# EAGLE board movimiento (EAGLE 8.7.1)
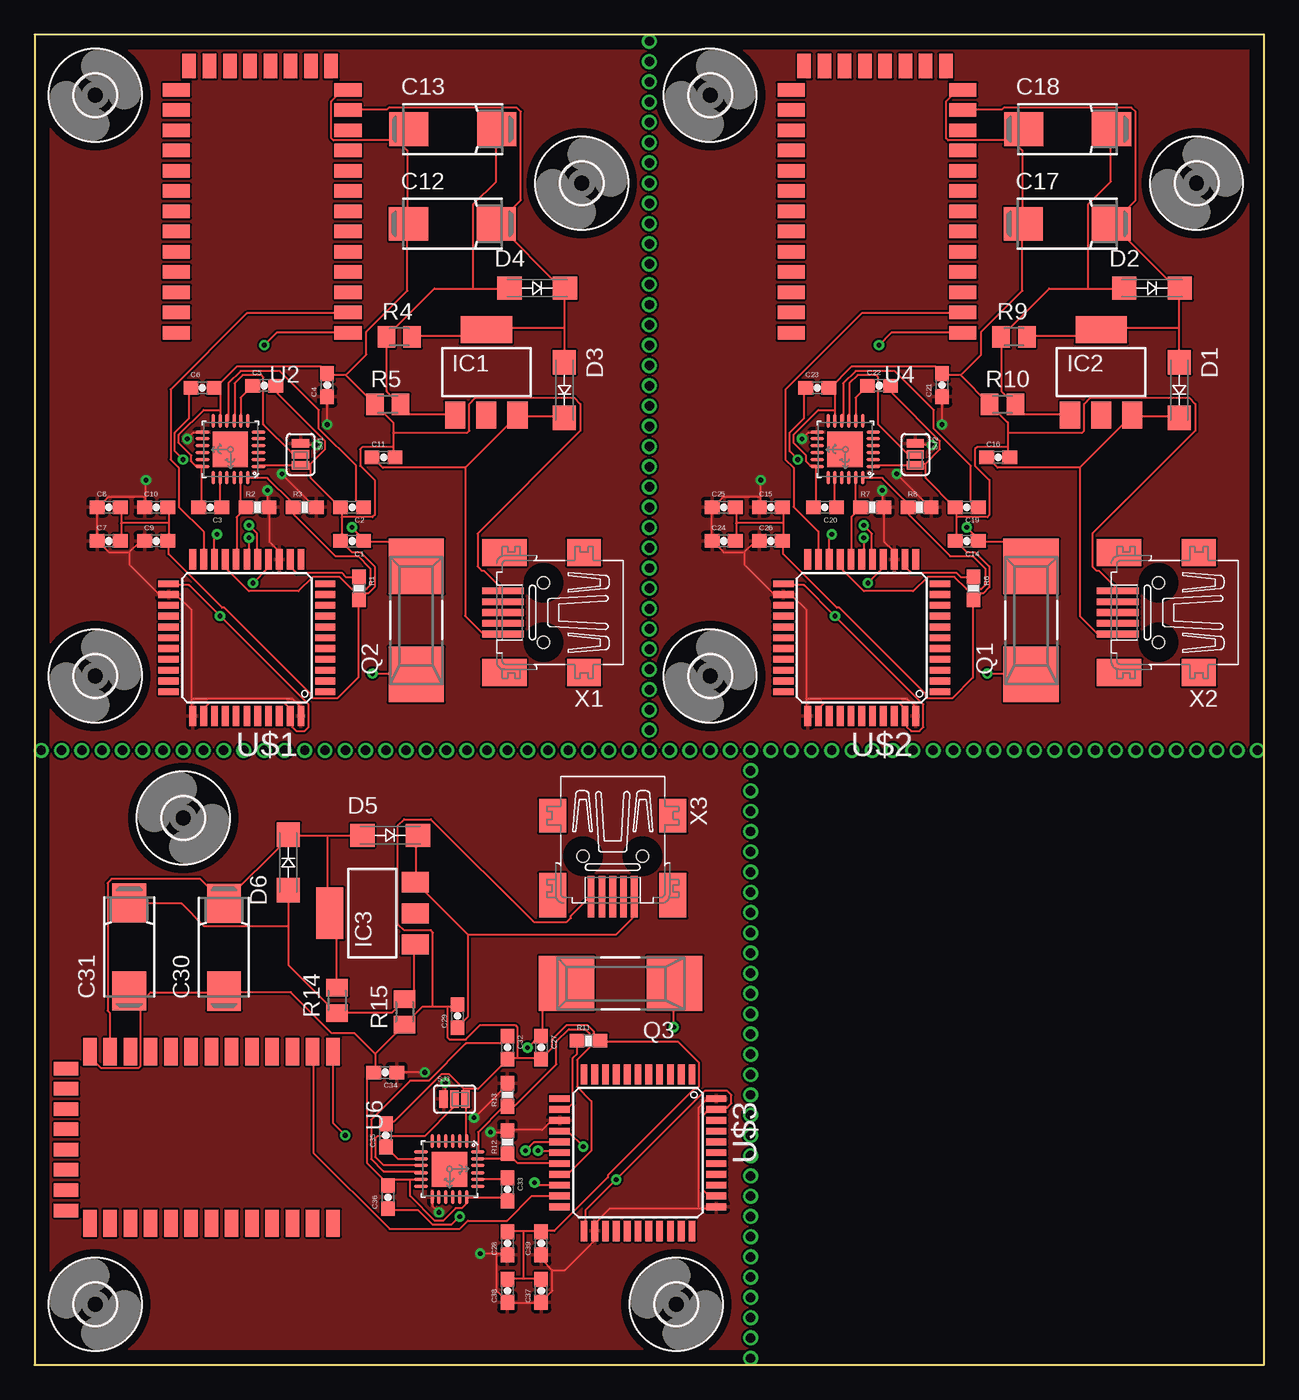
[diagram p0: board, top side]
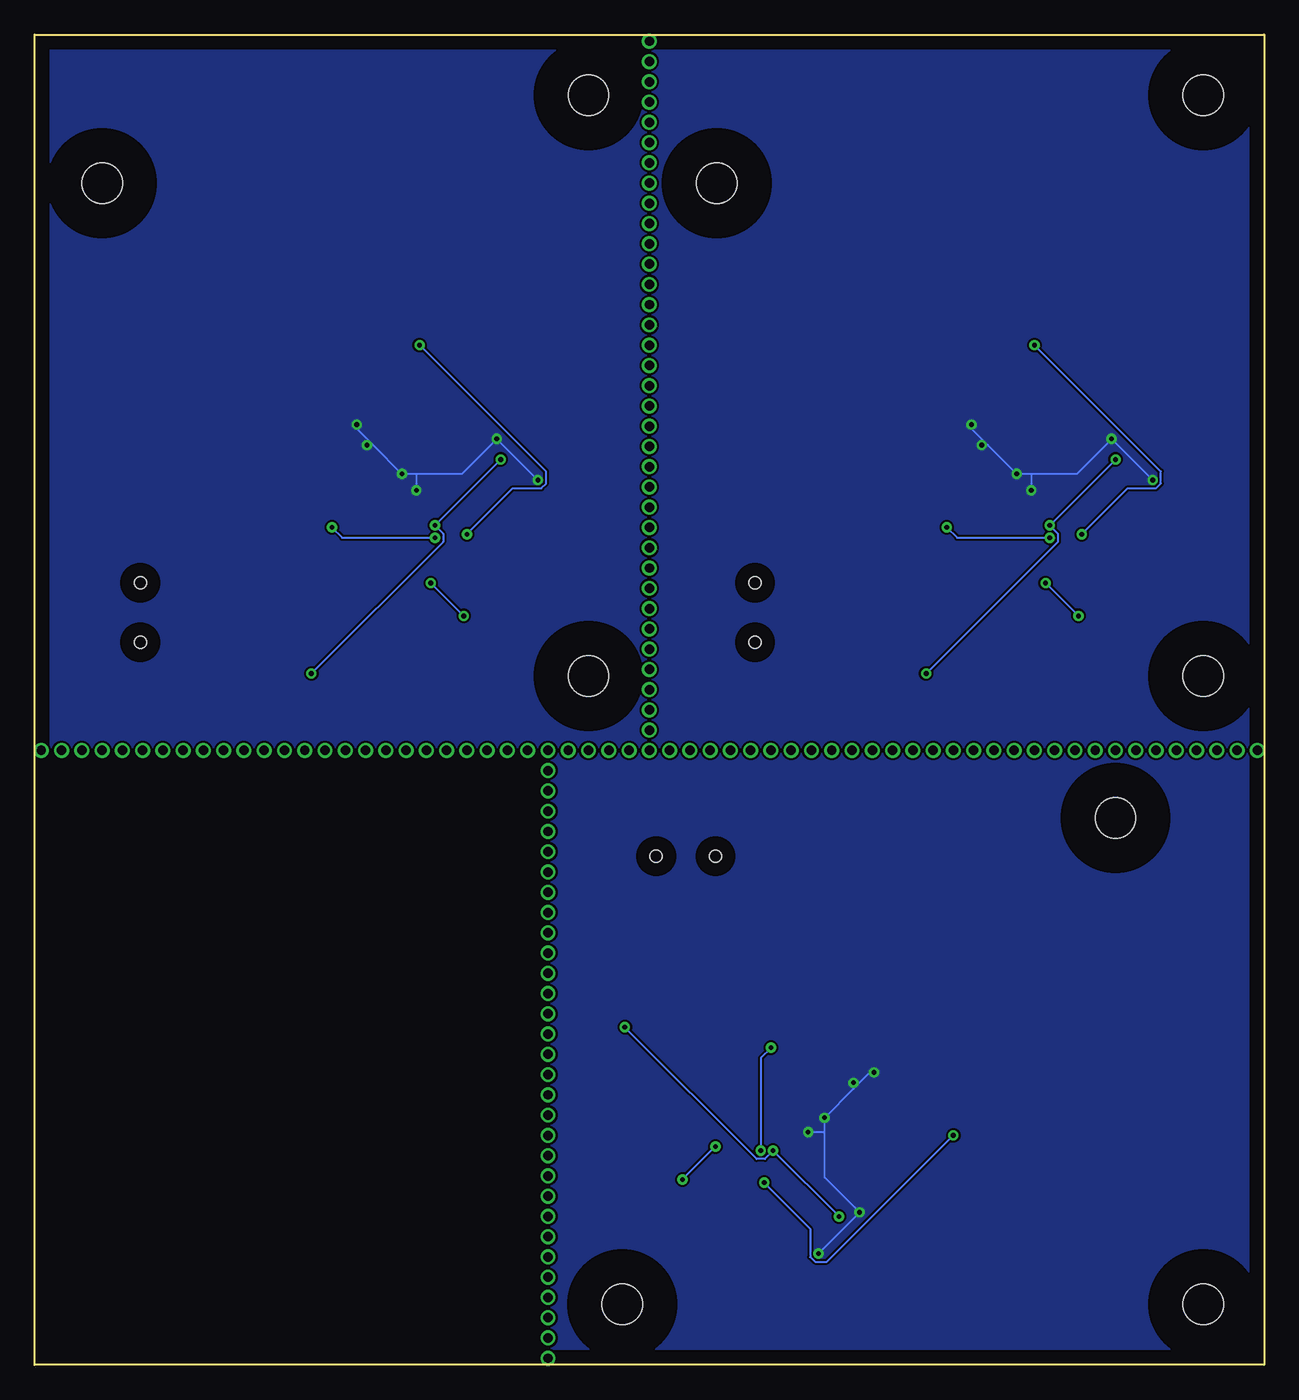
[diagram p1: board, bottom side, seen from below]

Size 91 x 98.5 mm. Coordinates in mm from the lower left corner, seen from the top.
Outline: 0,0 91,0 91,98.5 0,98.5 0,0
Copper layers (1*16): Top 0.035mm / dielectric 1.5mm / Bottom 0.035mm
Design rules "default": minimum track width 6mil, minimum drill 0.35mm, track to track 6mil, track to pad 6mil, pad to pad 6mil, via to via 6mil, smd to smd 6mil, copper to edge 40mil, drill to drill 6mil, minimum pad ring 10mil, minimum via ring 8mil, stop-mask expansion 4mil, vias tented up to drill 0mil, thermal gap 10mil

## Footprints (pad centres in the part's own frame; a part is rotated, then mirrored left to right if it is on the bottom)
0603-CAP = smd 1.1 x 1: 1 -0.85,0; 2 0.85,0
085CS_1AR = smd 2.9 x 2.5: + 3.25,0; - -3.25,0
SMA-DO214AC = smd 1.8 x 1.7: A -2.05,0; K 2.05,0
3,0 = hole 3: 0,0
SOT223 = smd 1.5 x 2: 1 -2.3,-3.15; 2 0,-3.15; 3 2.3,-3.15 | smd 3.8 x 2: 4 0,3.15
MC-405 = smd 4.1 x 4.1: 1 -4,0; 2 4,0
0603-RES = smd 1.1 x 1: 1 -0.85,0; 2 0.85,0
M0805 = smd 1.3 x 1.6: 1 -0.95,0; 2 0.95,0
SJ_3_PASTE2&3 = smd 0.635 x 1.27: 1 -0.813,0; 2 0,0; 3 0.813,0
QFN-24-4MM2 = smd 1.016 x 0.254: 1 -2.066,1.257; 2 -2.066,0.75; 3 -2.066,0.247; 4 -2.066,-0.287; 5 -2.066,-0.792; 6 -2.066,-1.297; 13 2.086,-1.297; 14 2.086,-0.792; 15 2.086,-0.287; 16 2.086,0.247; 17 2.086,0.75; 18 2.086,1.257 | smd 0.254 x 1.016: 7 -1.267,-2.122; 8 -0.762,-2.122; 9 -0.258,-2.122; 10 0.278,-2.122; 11 0.78,-2.122; 12 1.287,-2.122; 19 1.287,2.082; 20 0.78,2.082; 21 0.278,2.082; 22 -0.258,2.082; 23 -0.762,2.082; 24 -1.267,2.082 | smd 2.616 x 2.616: P$1 0.02,-0.01
BLUETOOTH_SMD = smd 2 x 1: 1 -6.38,5.08; 2 -6.38,3.58; 3 -6.38,2.08; 4 -6.38,0.58; 5 -6.38,-0.92; 6 -6.38,-2.42; 7 -6.38,-3.92; 8 -6.38,-5.42; 9 -6.38,-6.92; 10 -6.38,-8.42; 11 -6.38,-9.92; 12 -6.38,-11.42; 13 -6.38,-12.92; 22 6.32,-12.92; 23 6.32,-11.42; 24 6.32,-9.92; 25 6.32,-8.42; 26 6.32,-6.92; 27 6.32,-5.42; 28 6.32,-3.92; 29 6.32,-2.42; 30 6.32,-0.92; 31 6.32,0.58; 32 6.32,2.08; 33 6.32,3.58; 34 6.32,5.08 | smd 1 x 1.8: 14 -5.13,-14.67; 15 -3.63,-14.67; 16 -2.13,-14.67; 17 -0.63,-14.67; 18 0.87,-14.67; 19 2.37,-14.67; 20 3.87,-14.67; 21 5.37,-14.67
TQFP44 = smd 1.5 x 0.5: 1 -5.8,4; 2 -5.8,3.2; 3 -5.8,2.4; 4 -5.8,1.6; 5 -5.8,0.8; 6 -5.8,0; 7 -5.8,-0.8; 8 -5.8,-1.6; 9 -5.8,-2.4; 10 -5.8,-3.2; 11 -5.8,-4; 23 5.8,-4; 24 5.8,-3.2; 25 5.8,-2.4; 26 5.8,-1.6; 27 5.8,-0.8; 28 5.8,0; 29 5.8,0.8; 30 5.8,1.6; 31 5.8,2.4; 32 5.8,3.2; 33 5.8,4 | smd 0.5 x 1.5: 12 -4,-5.8; 13 -3.2,-5.8; 14 -2.4,-5.8; 15 -1.6,-5.8; 16 -0.8,-5.8; 17 0,-5.8; 18 0.8,-5.8; 19 1.6,-5.8; 20 2.4,-5.8; 21 3.2,-5.8; 22 4,-5.8; 34 4,5.8; 35 3.2,5.8; 36 2.4,5.8; 37 1.6,5.8; 38 0.8,5.8; 39 0,5.8; 40 -0.8,5.8; 41 -1.6,5.8; 42 -2.4,5.8; 43 -3.2,5.8; 44 -4,5.8
32005-201 = smd 3.1 x 0.5: 1 3,1.6; 2 3,0.8; 3 3,0; 4 3,-0.8; 5 3,-1.6 | smd 2.5 x 2: M1 -3,-4.45; M2 -3,4.45 | smd 3.3 x 2: M3 2.9,4.45; M4 2.9,-4.45 | hole 0.9: 0,2.2; 0,-2.2

## Placement (x,y rotation side)
C1  0.1uF  [0603-CAP]  23.5,61 180 top
C2  0.1uF  [0603-CAP]  23.5,63.5 180 top
C3  2.2nF  [0603-CAP]  13,63.5 180 top
C4  0.1uF  [0603-CAP]  21.66,72.55 90 top
C5  10nF  [0603-CAP]  17,72.5 0 top
C6  0.1uF  [0603-CAP]  12.43,72.34 0 top
C7  10nF  [0603-CAP]  5.5,61 0 top
C8  10nF  [0603-CAP]  5.5,63.5 0 top
C9  10nF  [0603-CAP]  9,61 0 top
C10  10nF  [0603-CAP]  9,63.5 0 top
C11  10nF  [0603-CAP]  25.83,67.19 0 top
C12  1uF  [085CS_1AR]  30.93,84.48 0 top
C13  10uF  [085CS_1AR]  30.95,91.49 0 top
C14  0.1uF  [0603-CAP]  69,61 180 top
C15  10nF  [0603-CAP]  54.5,63.5 0 top
C16  10nF  [0603-CAP]  71.33,67.19 0 top
C17  1uF  [085CS_1AR]  76.43,84.48 0 top
C18  10uF  [085CS_1AR]  76.45,91.49 0 top
C19  0.1uF  [0603-CAP]  69,63.5 180 top
C20  2.2nF  [0603-CAP]  58.5,63.5 180 top
C21  0.1uF  [0603-CAP]  67.16,72.55 90 top
C22  10nF  [0603-CAP]  62.5,72.5 0 top
C23  0.1uF  [0603-CAP]  57.93,72.34 0 top
C24  10nF  [0603-CAP]  51,61 0 top
C25  10nF  [0603-CAP]  51,63.5 0 top
C26  10nF  [0603-CAP]  54.5,61 0 top
C27  0.1uF  [0603-CAP]  37.5,23.5 270 top
C28  10nF  [0603-CAP]  35,9 90 top
C29  10nF  [0603-CAP]  31.31,25.83 90 top
C30  1uF  [085CS_1AR]  14.02,30.93 90 top
C31  10uF  [085CS_1AR]  7.01,30.95 90 top
C32  0.1uF  [0603-CAP]  35,23.5 270 top
C33  2.2nF  [0603-CAP]  35,13 270 top
C34  0.1uF  [0603-CAP]  25.95,21.66 180 top
C35  10nF  [0603-CAP]  26,17 90 top
C36  0.1uF  [0603-CAP]  26.16,12.43 90 top
C37  10nF  [0603-CAP]  37.5,5.5 90 top
C38  10nF  [0603-CAP]  35,5.5 90 top
C39  10nF  [0603-CAP]  37.5,9 90 top
D1  GF1  [SMA-DO214AC]  84.72,72.18 270 top
D2  GF1  [SMA-DO214AC]  82.7,79.72 0 top
D3  GF1  [SMA-DO214AC]  39.22,72.18 270 top
D4  GF1  [SMA-DO214AC]  37.2,79.72 0 top
D5  GF1  [SMA-DO214AC]  26.32,39.22 0 top
D6  GF1  [SMA-DO214AC]  18.78,37.2 90 top
H1  MOUNT-HOLE3.0  [3,0]  4.5,51 0 top
H2  MOUNT-HOLE3.0  [3,0]  40.5,87.5 0 top
H3  MOUNT-HOLE3.0  [3,0]  4.5,94 0 top
H4  MOUNT-HOLE3.0  [3,0]  50,51 0 top
H5  MOUNT-HOLE3.0  [3,0]  86,87.5 0 top
H6  MOUNT-HOLE3.0  [3,0]  50,94 0 top
H7  MOUNT-HOLE3.0  [3,0]  47.5,4.5 90 top
H8  MOUNT-HOLE3.0  [3,0]  11,40.5 90 top
H9  MOUNT-HOLE3.0  [3,0]  4.5,4.5 90 top
IC1  LM317MBSTT3  [SOT223]  33.44,73.49 0 top
IC2  LM317MBSTT3  [SOT223]  78.94,73.49 0 top
IC3  LM317MBSTT3  [SOT223]  25.01,33.44 90 top
Q1  MC-405  [MC-405]  73.75,55.13 90 top
Q2  MC-405  [MC-405]  28.25,55.13 90 top
Q3  MC-405  [MC-405]  43.37,28.25 180 top
R1  10k  [0603-RES]  24,57.5 270 top
R2  10k  [0603-RES]  16.5,63.5 0 top
R3  10k  [0603-RES]  20,63.5 0 top
R4  240Ω  [M0805]  26.99,76.11 0 top
R5  394Ω  [M0805]  26.14,71.11 0 top
R6  10k  [0603-RES]  69.5,57.5 270 top
R7  10k  [0603-RES]  62,63.5 0 top
R8  10k  [0603-RES]  65.5,63.5 0 top
R9  240Ω  [M0805]  72.49,76.11 0 top
R10  394Ω  [M0805]  71.64,71.11 0 top
R11  10k  [0603-RES]  41,24 0 top
R12  10k  [0603-RES]  35,16.5 90 top
R13  10k  [0603-RES]  35,20 90 top
R14  240Ω  [M0805]  22.39,26.99 90 top
R15  394Ω  [M0805]  27.39,26.14 90 top
SJ1  [SJ_3_PASTE2&3]  19.69,67.41 270 top
SJ2  [SJ_3_PASTE2&3]  65.19,67.41 270 top
SJ3  [SJ_3_PASTE2&3]  31.09,19.69 0 top
U1  MPU-6050-1  [QFN-24-4MM2]  14.51,67.78 180 top
U2  HC_05  [BLUETOOTH_SMD]  16.82,81.49 180 top
U3  MPU-6050-1  [QFN-24-4MM2]  60.01,67.78 180 top
U4  HC_05  [BLUETOOTH_SMD]  62.32,81.49 180 top
U5  MPU-6050-1  [QFN-24-4MM2]  30.72,14.51 270 top
U6  HC_05  [BLUETOOTH_SMD]  17.01,16.82 270 top
U$1  ATMEGA32U4-AU  [TQFP44]  15.72,53.84 180 top
U$2  ATMEGA32U4-AU  [TQFP44]  61.22,53.84 180 top
U$3  ATMEGA32U4-AU  [TQFP44]  44.66,15.72 270 top
X1  MINI-USB-32005-201  [32005-201]  37.67,55.71 180 top
X2  MINI-USB-32005-201  [32005-201]  83.17,55.71 180 top
X3  MINI-USB-32005-201  [32005-201]  42.79,37.67 270 top

## Library data of the parts
C1-C11 C14-C16 C19-C29 C32-C39 R1-R3 R6-R8 R11-R13 SJ1-SJ3 = SparkFun
C12 C13 C17 C18 C30 C31 R4 R5 R9 R10 R14 R15 = resistor
D1-D6 = diode
H1-H9 = holes
IC1-IC3 = v-reg; PARTNUMBER: LM317M
Q1-Q3 = crystal; OC_FARNELL: unknown; OC_NEWARK: unknown
U1 U3 U5 = Testing
U2 U4 U6 = Modulo Bloutooth
U$1-U$3 = mega32U4
X1-X3 = con-cypressindustries; OC_FARNELL: unknown; OC_NEWARK: unknown

## Nets
ADO: SJ1.2 U1.9
ADO1: SJ2.2 U3.9
ADO2: SJ3.2 U5.9
AUX_SCL: U1.7
AUX_SCL1: U3.7
AUX_SCL2: U5.7
AUX_SDA: U1.6
AUX_SDA1: U3.6
AUX_SDA2: U5.6
GND: C1.2 C2.2 C3.2 C4.2 C5.2 C6.2 C7.2 C8.2 C9.2 C10.2 C11.2 C12.- C13.- R1.2 R5.1 SJ1.3 U1.1 U1.11 U1.18 U2.13 X1.5
GND1: C14.2 C15.2 C16.2 C17.- C18.- C19.2 C20.2 C21.2 C22.2 C23.2 C24.2 C25.2 C26.2 R6.2 R10.1 SJ2.3 U3.1 U3.11 U3.18 U4.13 X2.5
GND2: C27.2 C28.2 C29.2 C30.- C31.- C32.2 C33.2 C34.2 C35.2 C36.2 C37.2 C38.2 C39.2 R11.2 R15.1 SJ3.3 U5.1 U5.11 U5.18 U6.13 X3.5
N$1: C1.1 Q2.2 U$1.17
N$2: C6.1 Q2.1 U$1.16
N$3: R1.1 U$1.13
N$4: U$1.15 U$1.23 U$1.35 U$1.43
N$5: C3.1 U1.20
N$6: C2.1 U1.10
N$7: C13.+ D4.A IC1.1 R4.1 R5.2
N$8: C14.1 Q1.2 U$2.17
N$9: C23.1 Q1.1 U$2.16
N$10: C20.1 U3.20
N$11: C19.1 U3.10
N$12: R6.1 U$2.13
N$13: U$2.15 U$2.23 U$2.35 U$2.43
N$14: C18.+ D2.A IC2.1 R9.1 R10.2
N$15: C27.1 Q3.2 U$3.17
N$16: C36.1 Q3.1 U$3.16
N$17: C33.1 U5.20
N$18: C32.1 U5.10
N$19: R11.1 U$3.13
N$20: U$3.15 U$3.23 U$3.35 U$3.43
N$21: C31.+ D6.A IC3.1 R14.1 R15.2
RX: U2.1 U$1.20
RX1: U4.1 U$2.20
RX2: U6.1 U$3.20
SCL1: R2.1 U1.23 U$1.18
SCL2: R7.1 U3.23 U$2.18
SCL3: R12.1 U5.23 U$3.18
SDA: R3.1 U1.24 U$1.19
SDA1: R8.1 U3.24 U$2.19
SDA2: R13.1 U5.24 U$3.19
TX: U2.2 U$1.21
TX1: U4.2 U$2.21
TX2: U6.2 U$3.21
VCC: C4.1 C7.1 C8.1 C9.1 C10.1 R2.2 R3.2 SJ1.1 U1.13 U$1.14 U$1.24 U$1.34 U$1.44
VCC1: C15.1 C21.1 C24.1 C25.1 C26.1 R7.2 R8.2 SJ2.1 U3.13 U$2.14 U$2.24 U$2.34 U$2.44
VCC2: C28.1 C34.1 C37.1 C38.1 C39.1 R12.2 R13.2 SJ3.1 U5.13 U$3.14 U$3.24 U$3.34 U$3.44
VIN: C11.1 D3.K IC1.3 X1.1
VIN1: C16.1 D1.K IC2.3 X2.1
VIN2: C29.1 D5.K IC3.3 X3.1
VIO: C5.1 U1.8
VIO1: C22.1 U3.8
VIO2: C35.1 U5.8
VO: C12.+ D3.A D4.K IC1.4 R4.2 U2.12
VO1: C17.+ D1.A D2.K IC2.4 R9.2 U4.12
VO2: C30.+ D5.A D6.K IC3.4 R14.2 U6.12

## Tracks (layer width: path | path; a pad name or v marks a point on that pad's centre or on a via)
ADO
  Top 0.152: U1.9 14.8,69.93 14.8,72.68 15.41,73.29 16.78,73.29 16.93,73.13 16.93,69.63 19.07,67.49 19.68,67.49 SJ1.2
ADO1
  Top 0.152: U3.9 60.3,69.93 60.3,72.68 60.91,73.29 62.28,73.29 62.44,73.13 62.44,69.63 64.57,67.49 65.18,67.49 SJ2.2
ADO2
  Top 0.152: U5.9 28.57,14.8 25.82,14.8 25.21,15.41 25.21,16.78 25.37,16.94 28.87,16.94 31.01,19.07 31.01,19.68 SJ3.2
GND
  Top 0.152: U1.1 16.63,66.58 19.68,66.58 SJ1.3 19.83,66.73 20.44,66.73 | 20.44,66.73 21.51,67.8 21.51,68.41 18,71.91 18,72.37 C5.2 | 6.42,62.31 6.42,63.38 C8.2 | 6.42,62.31 6.42,61.09 C7.2 | 9.93,62.31 9.93,63.38 C10.2 | 9.93,62.31 9.93,61.09 C9.2 9.93,60.94 9.93,60.03 13.89,56.06 14.04,56.06 20.44,49.66 20.44,49.51 20.59,49.36 22.42,49.36 23.95,50.88 23.95,56.52 R1.2 24.1,56.67 24.55,57.13 24.71,57.13 25.16,57.59 25.16,59.11 24.1,60.18 23.49,60.18 22.73,60.94 C1.2 22.73,61.09 22.73,62.77 | 9.93,62.31 6.42,62.31 | 22.73,62.77 22.73,63.38 C2.2 22.57,63.53 20.44,65.67 20.44,66.73 | 26.84,90.66 22.12,90.66 21.96,90.81 21.96,93.56 22.73,94.32 23.18,94.32 U2.13 | 26.84,90.66 27.6,91.42 C13.- 26.84,90.66 | 26.84,90.66 27.6,89.9 27.6,84.56 C12.- 27.6,84.41 27.6,79.53 24.55,76.49 24.55,74.81 23.03,73.29 | 13.73,70.69 13.73,71.91 13.43,72.22 C6.2 13.43,72.37 14.95,73.89 21.2,73.89 21.66,73.44 C4.2 21.81,73.29 23.03,73.29 | 13.73,70.69 13.73,69.93 U1.11 | C3.2 12.21,63.53 12.36,63.68 12.36,66.43 U1.18 12.36,66.58 11.91,66.58 11.6,66.88 11.6,67.34 10.69,68.26 10.69,68.87 12.52,70.69 13.73,70.69 | 26.54,69.02 26.54,69.78 25.32,71 R5.1 25.16,71.15 23.03,73.29 | 26.54,69.02 26.54,67.95 | 26.54,67.95 26.54,67.34 C11.2 | 26.54,69.02 32.02,69.02 32.17,69.17 32.17,71.15 32.63,71.61 39.95,71.61 40.41,71.15 40.41,69.17 32.78,61.55 32.78,59.11 33.09,58.81 33.24,58.81 34.61,57.44 X1.5 | 22.73,62.77 25.01,62.77 25.16,62.92 25.16,65.51 24.1,66.58 24.1,67.8 24.25,67.95 26.54,67.95
GND1
  Top 0.152: U3.1 62.13,66.58 65.18,66.58 SJ2.3 65.33,66.73 65.94,66.73 | 65.94,66.73 67.01,67.8 67.01,68.41 63.5,71.91 63.5,72.37 C22.2 | 51.92,62.31 51.92,63.38 C25.2 | 51.92,62.31 51.92,61.09 C24.2 | 55.42,62.31 55.42,63.38 C15.2 | 55.42,62.31 55.42,61.09 C26.2 55.42,60.94 55.42,60.03 59.39,56.06 59.54,56.06 65.94,49.66 65.94,49.51 66.09,49.36 67.92,49.36 69.45,50.88 69.45,56.52 R6.2 69.6,56.67 70.06,57.13 70.21,57.13 70.67,57.59 70.67,59.11 69.6,60.18 68.99,60.18 68.23,60.94 C14.2 68.23,61.09 68.23,62.77 | 55.42,62.31 51.92,62.31 | 68.23,62.77 68.23,63.38 C19.2 68.07,63.53 65.94,65.67 65.94,66.73 | 72.34,90.66 67.62,90.66 67.46,90.81 67.46,93.56 68.23,94.32 68.68,94.32 U4.13 | 72.34,90.66 73.1,91.42 C18.- 72.34,90.66 | 72.34,90.66 73.1,89.9 73.1,84.56 C17.- 73.1,84.41 73.1,79.53 70.06,76.49 70.06,74.81 68.53,73.29 | 59.23,70.69 59.23,71.91 58.93,72.22 C23.2 58.93,72.37 60.45,73.89 66.7,73.89 67.16,73.44 C21.2 67.31,73.29 68.53,73.29 | 59.23,70.69 59.23,69.93 U3.11 | C20.2 57.71,63.53 57.86,63.68 57.86,66.43 U3.18 57.86,66.58 57.41,66.58 57.1,66.88 57.1,67.34 56.19,68.26 56.19,68.87 58.02,70.69 59.23,70.69 | 72.04,69.02 72.04,69.78 70.82,71 R10.1 70.67,71.15 68.53,73.29 | 72.04,69.02 72.04,67.95 | 72.04,67.95 72.04,67.34 C16.2 | 72.04,69.02 77.52,69.02 77.67,69.17 77.67,71.15 78.13,71.61 85.45,71.61 85.91,71.15 85.91,69.17 78.28,61.55 78.28,59.11 78.59,58.81 78.74,58.81 80.11,57.44 X2.5 | 68.23,62.77 70.51,62.77 70.67,62.92 70.67,65.51 69.6,66.58 69.6,67.8 69.75,67.95 72.04,67.95
GND2
  Top 0.152: U5.1 31.92,16.63 31.92,19.68 SJ3.3 31.77,19.83 31.77,20.44 | 31.77,20.44 30.7,21.51 30.09,21.51 26.59,18 26.13,18 C35.2 | 36.19,6.42 35.12,6.42 C38.2 | 36.19,6.42 37.41,6.42 C37.2 | 36.19,9.93 35.12,9.93 C28.2 | 36.19,9.93 37.41,9.93 C39.2 37.56,9.93 38.47,9.93 42.44,13.89 42.44,14.04 48.84,20.44 48.99,20.44 49.14,20.59 49.14,22.42 47.62,23.95 41.98,23.95 R11.2 41.83,24.1 41.37,24.55 41.37,24.71 40.91,25.16 39.39,25.16 38.32,24.1 38.32,23.49 37.56,22.73 C27.2 37.41,22.73 35.73,22.73 | 36.19,9.93 36.19,6.42 | 35.73,22.73 35.12,22.73 C32.2 34.97,22.57 32.83,20.44 31.77,20.44 | 7.84,26.84 7.84,22.12 7.69,21.96 4.95,21.96 4.18,22.73 4.18,23.18 U6.13 | 7.84,26.84 7.08,27.6 C31.- 7.84,26.84 | 7.84,26.84 8.6,27.6 13.94,27.6 C30.- 14.09,27.6 18.97,27.6 22.01,24.55 23.69,24.55 25.21,23.03 | 27.8,13.73 26.59,13.73 26.28,13.43 C36.2 26.13,13.43 24.61,14.95 24.61,21.2 25.06,21.66 C34.2 25.21,21.81 25.21,23.03 | 27.8,13.73 28.57,13.73 U5.11 | C33.2 34.97,12.21 34.82,12.36 32.07,12.36 U5.18 31.92,12.36 31.92,11.91 31.62,11.6 31.16,11.6 30.24,10.69 29.63,10.69 27.8,12.52 27.8,13.73 | 29.48,26.54 28.72,26.54 27.5,25.32 R15.1 27.35,25.16 25.21,23.03 | 29.48,26.54 30.55,26.54 | 30.55,26.54 31.16,26.54 C29.2 | 29.48,26.54 29.48,32.02 29.33,32.17 27.35,32.17 26.89,32.63 26.89,39.95 27.35,40.41 29.33,40.41 36.95,32.78 39.39,32.78 39.69,33.09 39.69,33.24 41.06,34.61 X3.5 | 35.73,22.73 35.73,25.01 35.58,25.16 32.99,25.16 31.92,24.1 30.7,24.1 30.55,24.25 30.55,26.54
N$1  (via drill 0.35)
  Top 0.152: Q2.2 28.21,59.27 26.54,60.94 24.4,60.94 C1.1 24.4,61.09 v23.49,62.01 | v15.87,61.25 15.87,59.72 U$1.17
  Bottom 0.152: v15.87,61.25 22.73,61.25 v23.49,62.01
N$2  (via drill 0.35)
  Top 0.152: v10.99,67.04 10.38,67.65 10.38,69.02 11.45,70.08 11.45,72.22 C6.1 | v15.87,62.16 16.48,61.55 16.48,59.72 U$1.16 | v25.01,51.19 28.21,51.19 Q2.1
  Bottom 0.152: v10.99,67.04 v15.87,62.16 15.26,61.55 15.26,60.94 v25.01,51.19
N$3
  Top 0.152: R1.1 23.95,58.35 23.03,58.35 22.73,58.66 19.37,58.66 19.07,58.96 19.07,59.57 U$1.13
N$4  (via drill 0.35)
  Top 0.152: U$1.35 12.67,48.14 12.67,48.75 12.97,49.05 18.46,49.05 18.92,48.6 18.92,48.14 U$1.43 19.07,47.99 19.07,47.23 19.37,46.92 19.98,46.92 20.29,47.23 20.29,48.9 v13.73,55.45 11.45,57.74 9.93,57.74 U$1.23 | v16.17,57.89 17.24,58.96 17.24,59.57 U$1.15
  Bottom 0.152: v13.73,55.45 v16.17,57.89
N$5
  Top 0.152: U1.20 13.73,65.67 13.73,63.53 C3.1
N$6
  Top 0.152: U1.10 14.34,69.93 14.34,72.68 15.26,73.59 18.15,73.59 21.05,70.69 21.05,69.32 23.79,66.58 23.79,63.99 24.25,63.53 C2.1
N$7
  Top 0.152: 32.48,79.69 29.58,79.69 26.08,76.18 R4.1 26.08,76.03 26.08,72.07 26.99,71.15 R5.2 27.15,71 27.76,70.39 31.11,70.39 IC1.1 | 32.48,79.69 35.07,79.69 D4.A | 32.48,79.69 32.48,85.94 34.16,87.61 34.16,91.42 C13.+
N$8  (via drill 0.35)
  Top 0.152: Q1.2 73.71,59.27 72.04,60.94 69.9,60.94 C14.1 69.9,61.09 v68.99,62.01 | v61.37,61.25 61.37,59.72 U$2.17
  Bottom 0.152: v61.37,61.25 68.23,61.25 v68.99,62.01
N$9  (via drill 0.35)
  Top 0.152: v56.49,67.04 55.88,67.65 55.88,69.02 56.95,70.08 56.95,72.22 C23.1 | v61.37,62.16 61.98,61.55 61.98,59.72 U$2.16 | v70.51,51.19 73.71,51.19 Q1.1
  Bottom 0.152: v56.49,67.04 v61.37,62.16 60.76,61.55 60.76,60.94 v70.51,51.19
N$10
  Top 0.152: U3.20 59.23,65.67 59.23,63.53 C20.1
N$11
  Top 0.152: U3.10 59.84,69.93 59.84,72.68 60.76,73.59 63.65,73.59 66.55,70.69 66.55,69.32 69.29,66.58 69.29,63.99 69.75,63.53 C19.1
N$12
  Top 0.152: R6.1 69.45,58.35 68.53,58.35 68.23,58.66 64.87,58.66 64.57,58.96 64.57,59.57 U$2.13
N$13  (via drill 0.35)
  Top 0.152: U$2.35 58.17,48.14 58.17,48.75 58.47,49.05 63.96,49.05 64.42,48.6 64.42,48.14 U$2.43 64.57,47.99 64.57,47.23 64.87,46.92 65.48,46.92 65.79,47.23 65.79,48.9 v59.23,55.45 56.95,57.74 55.42,57.74 U$2.23 | v61.67,57.89 62.74,58.96 62.74,59.57 U$2.15
  Bottom 0.152: v59.23,55.45 v61.67,57.89
N$14
  Top 0.152: 77.98,79.69 75.08,79.69 71.58,76.18 R9.1 71.58,76.03 71.58,72.07 72.49,71.15 R10.2 72.65,71 73.26,70.39 76.61,70.39 IC2.1 | 77.98,79.69 80.57,79.69 D2.A | 77.98,79.69 77.98,85.94 79.66,87.61 79.66,91.42 C18.+
N$15  (via drill 0.35)
  Top 0.152: Q3.2 39.23,28.21 37.56,26.54 37.56,24.4 C27.1 37.41,24.4 v36.49,23.49 | v37.25,15.87 38.78,15.87 U$3.17
  Bottom 0.152: v37.25,15.87 37.25,22.73 v36.49,23.49
N$16  (via drill 0.35)
  Top 0.152: v31.46,10.99 30.85,10.38 29.48,10.38 28.41,11.45 26.28,11.45 C36.1 | v36.34,15.87 36.95,16.48 38.78,16.48 U$3.16 | v47.31,25.01 47.31,28.21 Q3.1
  Bottom 0.152: v31.46,10.99 v36.34,15.87 36.95,15.26 37.56,15.26 v47.31,25.01
N$17
  Top 0.152: U5.20 32.83,13.73 34.97,13.73 C33.1
N$18
  Top 0.152: U5.10 28.57,14.34 25.82,14.34 24.91,15.26 24.91,18.15 27.8,21.05 29.18,21.05 31.92,23.79 34.51,23.79 34.97,24.25 C32.1
N$19
  Top 0.152: R11.1 40.15,23.95 40.15,23.03 39.84,22.73 39.84,19.37 39.54,19.07 38.93,19.07 U$3.13
N$20  (via drill 0.35)
  Top 0.152: U$3.35 50.36,12.67 49.75,12.67 49.45,12.97 49.45,18.46 49.9,18.92 50.36,18.92 U$3.43 50.51,19.07 51.27,19.07 51.58,19.37 51.58,19.98 51.27,20.29 49.6,20.29 v43.05,13.73 40.76,11.45 40.76,9.93 U$3.23 | v40.61,16.17 39.54,17.24 38.93,17.24 U$3.15
  Bottom 0.152: v43.05,13.73 v40.61,16.17
N$21
  Top 0.152: 18.81,32.48 18.81,29.58 22.32,26.08 R14.1 22.47,26.08 26.43,26.08 27.35,26.99 R15.2 27.5,27.15 28.11,27.76 28.11,31.11 IC3.1 | 18.81,32.48 18.81,35.07 D6.A | 18.81,32.48 12.56,32.48 10.89,34.16 7.08,34.16 C31.+
RX  (via drill 0.35)
  Top 0.152: U$1.20 13.32,61.32 v13.5,61.5 | U2.1 17.91,76.41 v17,75.5
  Bottom 0.152: v13.5,61.5 10.09,64.91 8,64.91 7.64,65.26 7.64,66.14 v17,75.5
RX1  (via drill 0.35)
  Top 0.152: U$2.20 58.82,61.32 v59,61.5 | U4.1 63.41,76.41 v62.5,75.5
  Bottom 0.152: v59,61.5 55.59,64.91 53.5,64.91 53.14,65.26 53.14,66.14 v62.5,75.5
RX2  (via drill 0.35)
  Top 0.152: U$3.20 37.18,13.32 v37,13.5 | U6.1 22.09,17.91 v23,17
  Bottom 0.152: v37,13.5 33.59,10.09 33.59,8 33.24,7.64 32.36,7.64 v23,17
S$1  (via drill 0.7)
  other vias: 45.5,98
S$2  (via drill 0.7)
  other vias: 45.5,96.5
S$3  (via drill 0.7)
  other vias: 45.5,95
S$4  (via drill 0.7)
  other vias: 45.5,93.5
S$5  (via drill 0.7)
  other vias: 45.5,92
S$6  (via drill 0.7)
  other vias: 45.5,90.5
S$7  (via drill 0.7)
  other vias: 45.5,89
S$8  (via drill 0.7)
  other vias: 45.5,87.5
S$9  (via drill 0.7)
  other vias: 45.5,86
S$10  (via drill 0.7)
  other vias: 45.5,84.5
S$11  (via drill 0.7)
  other vias: 45.5,83
S$12  (via drill 0.7)
  other vias: 45.5,81.5
S$13  (via drill 0.7)
  other vias: 45.5,80
S$14  (via drill 0.7)
  other vias: 45.5,78.5
S$15  (via drill 0.7)
  other vias: 45.5,77
S$16  (via drill 0.7)
  other vias: 45.5,75.5
S$17  (via drill 0.7)
  other vias: 45.5,74
S$18  (via drill 0.7)
  other vias: 45.5,72.5
S$19  (via drill 0.7)
  other vias: 45.5,71
S$20  (via drill 0.7)
  other vias: 45.5,69.5
S$21  (via drill 0.7)
  other vias: 45.5,68
S$22  (via drill 0.7)
  other vias: 45.5,66.5
S$23  (via drill 0.7)
  other vias: 45.5,65
S$24  (via drill 0.7)
  other vias: 45.5,63.5
S$25  (via drill 0.7)
  other vias: 45.5,62
S$26  (via drill 0.7)
  other vias: 45.5,60.5
S$27  (via drill 0.7)
  other vias: 45.5,59
S$28  (via drill 0.7)
  other vias: 45.5,57.5
S$29  (via drill 0.7)
  other vias: 45.5,56
S$30  (via drill 0.7)
  other vias: 45.5,54.5
S$31  (via drill 0.7)
  other vias: 45.5,53
S$32  (via drill 0.7)
  other vias: 45.5,51.5
S$33  (via drill 0.7)
  other vias: 45.5,50
S$34  (via drill 0.7)
  other vias: 45.5,48.5
S$35  (via drill 0.7)
  other vias: 45.5,47
S$36  (via drill 0.7)
  other vias: 45.5,45.5
S$37  (via drill 0.7)
  other vias: 44,45.5
S$38  (via drill 0.7)
  other vias: 42.5,45.5
S$39  (via drill 0.7)
  other vias: 41,45.5
S$40  (via drill 0.7)
  other vias: 39.5,45.5
S$41  (via drill 0.7)
  other vias: 38,45.5
S$42  (via drill 0.7)
  other vias: 36.5,45.5
S$43  (via drill 0.7)
  other vias: 35,45.5
S$44  (via drill 0.7)
  other vias: 33.5,45.5
S$45  (via drill 0.7)
  other vias: 32,45.5
S$46  (via drill 0.7)
  other vias: 30.5,45.5
S$47  (via drill 0.7)
  other vias: 29,45.5
S$48  (via drill 0.7)
  other vias: 27.5,45.5
S$49  (via drill 0.7)
  other vias: 26,45.5
S$50  (via drill 0.7)
  other vias: 24.5,45.5
S$51  (via drill 0.7)
  other vias: 23,45.5
S$52  (via drill 0.7)
  other vias: 21.5,45.5
S$53  (via drill 0.7)
  other vias: 20,45.5
S$54  (via drill 0.7)
  other vias: 18.5,45.5
S$55  (via drill 0.7)
  other vias: 17,45.5
S$56  (via drill 0.7)
  other vias: 15.5,45.5
S$57  (via drill 0.7)
  other vias: 14,45.5
S$58  (via drill 0.7)
  other vias: 12.5,45.5
S$59  (via drill 0.7)
  other vias: 11,45.5
S$60  (via drill 0.7)
  other vias: 9.5,45.5
S$61  (via drill 0.7)
  other vias: 8,45.5
S$62  (via drill 0.7)
  other vias: 6.5,45.5
S$63  (via drill 0.7)
  other vias: 5,45.5
S$64  (via drill 0.7)
  other vias: 3.5,45.5
S$65  (via drill 0.7)
  other vias: 2,45.5
S$66  (via drill 0.7)
  other vias: 0.5,45.5
S$67  (via drill 0.7)
  other vias: 47,45.5
S$68  (via drill 0.7)
  other vias: 48.5,45.5
S$69  (via drill 0.7)
  other vias: 50,45.5
S$70  (via drill 0.7)
  other vias: 51.5,45.5
S$71  (via drill 0.7)
  other vias: 53,45.5
S$72  (via drill 0.7)
  other vias: 54.5,45.5
S$73  (via drill 0.7)
  other vias: 56,45.5
S$74  (via drill 0.7)
  other vias: 57.5,45.5
S$75  (via drill 0.7)
  other vias: 59,45.5
S$76  (via drill 0.7)
  other vias: 60.5,45.5
S$77  (via drill 0.7)
  other vias: 62,45.5
S$78  (via drill 0.7)
  other vias: 63.5,45.5
S$79  (via drill 0.7)
  other vias: 65,45.5
S$80  (via drill 0.7)
  other vias: 66.5,45.5
S$81  (via drill 0.7)
  other vias: 68,45.5
S$82  (via drill 0.7)
  other vias: 69.5,45.5
S$83  (via drill 0.7)
  other vias: 71,45.5
S$84  (via drill 0.7)
  other vias: 72.5,45.5
S$85  (via drill 0.7)
  other vias: 74,45.5
S$86  (via drill 0.7)
  other vias: 75.5,45.5
S$87  (via drill 0.7)
  other vias: 77,45.5
S$88  (via drill 0.7)
  other vias: 78.5,45.5
S$89  (via drill 0.7)
  other vias: 80,45.5
S$90  (via drill 0.7)
  other vias: 81.5,45.5
S$91  (via drill 0.7)
  other vias: 83,45.5
S$92  (via drill 0.7)
  other vias: 84.5,45.5
S$93  (via drill 0.7)
  other vias: 86,45.5
S$94  (via drill 0.7)
  other vias: 87.5,45.5
S$95  (via drill 0.7)
  other vias: 89,45.5
S$96  (via drill 0.7)
  other vias: 90.5,45.5
S$97  (via drill 0.7)
  other vias: 53,44
S$98  (via drill 0.7)
  other vias: 53,42.5
S$99  (via drill 0.7)
  other vias: 53,41
S$100  (via drill 0.7)
  other vias: 53,39.5
S$101  (via drill 0.7)
  other vias: 53,38
S$102  (via drill 0.7)
  other vias: 53,36.5
S$103  (via drill 0.7)
  other vias: 53,35
S$104  (via drill 0.7)
  other vias: 53,33.5
S$105  (via drill 0.7)
  other vias: 53,32
S$106  (via drill 0.7)
  other vias: 53,30.5
S$107  (via drill 0.7)
  other vias: 53,29
S$108  (via drill 0.7)
  other vias: 53,27.5
S$109  (via drill 0.7)
  other vias: 53,26
S$110  (via drill 0.7)
  other vias: 53,24.5
S$111  (via drill 0.7)
  other vias: 53,23
S$112  (via drill 0.7)
  other vias: 53,21.5
S$113  (via drill 0.7)
  other vias: 53,20
S$114  (via drill 0.7)
  other vias: 53,18.5
S$115  (via drill 0.7)
  other vias: 53,17
S$116  (via drill 0.7)
  other vias: 53,15.5
S$117  (via drill 0.7)
  other vias: 53,14
S$118  (via drill 0.7)
  other vias: 53,12.5
S$119  (via drill 0.7)
  other vias: 53,11
S$120  (via drill 0.7)
  other vias: 53,9.5
S$121  (via drill 0.7)
  other vias: 53,8
S$122  (via drill 0.7)
  other vias: 53,6.5
S$123  (via drill 0.7)
  other vias: 53,5
S$124  (via drill 0.7)
  other vias: 53,3.5
S$125  (via drill 0.7)
  other vias: 53,2
S$126  (via drill 0.7)
  other vias: 53,0.5
SCL1
  Top 0.152: U1.23 15.26,65.67 15.26,63.84 15.56,63.53 R2.1 15.56,63.38 14.95,62.77 14.95,59.72 U$1.18
SCL2
  Top 0.152: U3.23 60.76,65.67 60.76,63.84 61.06,63.53 R7.1 61.06,63.38 60.45,62.77 60.45,59.72 U$2.18
SCL3
  Top 0.152: U5.23 32.83,15.26 34.66,15.26 34.97,15.56 R12.1 35.12,15.56 35.73,14.95 38.78,14.95 U$3.18
SDA
  Top 0.152: U1.24 15.87,65.67 17.24,65.67 19.07,63.84 19.07,63.53 R3.1 19.22,63.38 19.22,62.92 22.27,59.87 23.95,59.87 24.86,58.96 24.86,57.74 24.55,57.44 23.49,57.44 22.57,58.35 20.59,58.35 19.53,57.28 15.87,57.28 14.19,58.96 14.19,59.57 U$1.19
SDA1
  Top 0.152: U3.24 61.37,65.67 62.74,65.67 64.57,63.84 64.57,63.53 R8.1 64.72,63.38 64.72,62.92 67.77,59.87 69.45,59.87 70.36,58.96 70.36,57.74 70.06,57.44 68.99,57.44 68.07,58.35 66.09,58.35 65.03,57.28 61.37,57.28 59.69,58.96 59.69,59.57 U$2.19
SDA2
  Top 0.152: U5.24 32.83,15.87 32.83,17.24 34.66,19.07 34.97,19.07 R13.1 35.12,19.22 35.58,19.22 38.63,22.27 38.63,23.95 39.54,24.86 40.76,24.86 41.06,24.55 41.06,23.49 40.15,22.57 40.15,20.59 41.22,19.53 41.22,15.87 39.54,14.19 38.93,14.19 U$3.19
TX
  Top 0.152: U$1.21 12.52,59.72 12.52,61.7 10.69,63.53 10.69,66.43 10.08,67.04 10.08,72.22 15.72,77.86 23.18,77.86 U2.2
TX1
  Top 0.152: U$2.21 58.02,59.72 58.02,61.7 56.19,63.53 56.19,66.43 55.58,67.04 55.58,72.22 61.22,77.86 68.68,77.86 U4.2
TX2
  Top 0.152: U$3.21 38.78,12.52 36.8,12.52 34.97,10.69 32.07,10.69 31.46,10.08 26.28,10.08 20.64,15.72 20.64,23.18 U6.2
VCC  (via drill 0.35)
  Top 0.152: U$1.14 18,59.72 18,60.33 17.39,60.94 17.39,63.38 R2.2 17.24,63.53 v17.24,64.75 | v11.3,68.56 11.75,69.02 12.36,69.02 U1.13 | 8.25,64.29 8.25,63.53 C10.1 | 8.25,64.29 v8.25,65.51 | v18.31,65.97 20.75,63.53 R3.2 | v21.66,69.63 21.66,71.61 C4.1 | v20.9,68.1 19.83,68.1 SJ1.1 | 7.03,60.18 7.79,60.94 8.1,60.94 C9.1 | 7.03,60.18 5.5,60.18 4.74,60.94 C7.1 4.59,61.09 4.59,63.38 C8.1 4.74,63.53 5.5,64.29 8.25,64.29 | 7.03,60.18 7.03,59.27 9.16,57.13 9.77,57.13 U$1.24 9.93,56.98 10.53,56.98 11.6,55.91 11.6,49.36 | 11.6,49.36 11.6,48.14 U$1.34 | 11.6,49.36 19.07,49.36 19.68,48.75 19.68,48.14 U$1.44
  Bottom 0.152: v8.25,65.51 v11.3,68.56 13.89,65.97 17.24,65.97 | 17.24,65.97 v18.31,65.97 20.44,68.1 | v21.66,69.63 21.66,69.32 20.44,68.1 | 20.44,68.1 v20.9,68.1 | 17.24,65.97 v17.24,64.75
  pour Bottom: 0,98.5 45.5,98.5 45.5,45.5 0,45.5
  pour Top: 0,98.5 45.5,98.5 45.5,45.5 0,45.5
VCC1  (via drill 0.35)
  Top 0.152: U$2.14 63.5,59.72 63.5,60.33 62.89,60.94 62.89,63.38 R7.2 62.74,63.53 v62.74,64.75 | v56.8,68.56 57.25,69.02 57.86,69.02 U3.13 | 53.75,64.29 53.75,63.53 C15.1 | 53.75,64.29 v53.75,65.51 | v63.81,65.97 66.25,63.53 R8.2 | v67.16,69.63 67.16,71.61 C21.1 | v66.4,68.1 65.33,68.1 SJ2.1 | 52.53,60.18 53.29,60.94 53.6,60.94 C26.1 | 52.53,60.18 51.01,60.18 50.24,60.94 C24.1 50.09,61.09 50.09,63.38 C25.1 50.24,63.53 51.01,64.29 53.75,64.29 | 52.53,60.18 52.53,59.27 54.66,57.13 55.27,57.13 U$2.24 55.42,56.98 56.03,56.98 57.1,55.91 57.1,49.36 | 57.1,49.36 57.1,48.14 U$2.34 | 57.1,49.36 64.57,49.36 65.18,48.75 65.18,48.14 U$2.44
  Bottom 0.152: v53.75,65.51 v56.8,68.56 59.39,65.97 62.74,65.97 | 62.74,65.97 v63.81,65.97 65.94,68.1 | v67.16,69.63 67.16,69.32 65.94,68.1 | 65.94,68.1 v66.4,68.1 | 62.74,65.97 v62.74,64.75
  pour Bottom: 45.5,98.5 91,98.5 91,45.5 45.5,45.5
  pour Top: 45.5,98.5 91,98.5 91,45.5 45.5,45.5
VCC2  (via drill 0.35)
  Top 0.152: U$3.14 38.78,18 38.17,18 37.56,17.39 35.12,17.39 R12.2 34.97,17.24 v33.75,17.24 | v29.94,11.3 29.48,11.75 29.48,12.36 U5.13 | 34.21,8.25 34.97,8.25 C28.1 | 34.21,8.25 v32.99,8.25 | v32.53,18.31 34.97,20.75 R13.2 | v28.87,21.66 26.89,21.66 C34.1 | v30.4,20.9 30.4,19.83 SJ3.1 | 38.32,7.03 37.56,7.79 37.56,8.1 C39.1 | 38.32,7.03 38.32,5.5 37.56,4.74 C37.1 37.41,4.59 35.12,4.59 C38.1 34.97,4.74 34.21,5.5 34.21,8.25 | 38.32,7.03 39.23,7.03 41.37,9.16 41.37,9.77 U$3.24 41.52,9.93 41.52,10.53 42.59,11.6 49.14,11.6 | 49.14,11.6 50.36,11.6 U$3.34 | 49.14,11.6 49.14,19.07 49.75,19.68 50.36,19.68 U$3.44
  Bottom 0.152: v32.99,8.25 v29.94,11.3 32.53,13.89 32.53,17.24 | 32.53,17.24 v32.53,18.31 30.4,20.44 | v28.87,21.66 29.18,21.66 30.4,20.44 | 30.4,20.44 v30.4,20.9 | 32.53,17.24 v33.75,17.24
  pour Bottom: 0,0 0,45.5 53,45.5 53,0
  pour Top: 0,0 0,45.5 53,45.5 53,0
VIN
  Top 0.152: 31.87,66.43 25.77,66.43 25.01,67.19 C11.1 | 31.87,66.43 35.68,70.24 IC1.3 35.83,70.24 39.19,70.24 D3.K | 31.87,66.43 31.87,55.45 33.09,54.24 34.61,54.24 X1.1
VIN1
  Top 0.152: 77.37,66.43 71.27,66.43 70.51,67.19 C16.1 | 77.37,66.43 81.18,70.24 IC2.3 81.33,70.24 84.69,70.24 D1.K | 77.37,66.43 77.37,55.45 78.59,54.24 80.11,54.24 X2.1
VIN2
  Top 0.152: 32.07,31.87 32.07,25.77 31.31,25.01 C29.1 | 32.07,31.87 28.26,35.68 IC3.3 28.26,35.83 28.26,39.19 D5.K | 32.07,31.87 43.05,31.87 44.26,33.09 44.26,34.61 X3.1
VIO
  Top 0.152: U1.8 15.26,69.93 15.26,71.61 16.02,72.37 C5.1
VIO1
  Top 0.152: U3.8 60.76,69.93 60.76,71.61 61.52,72.37 C22.1
VIO2
  Top 0.152: U5.8 28.57,15.26 26.89,15.26 26.13,16.02 C35.1
VO
  Top 0.152: 39.19,76.79 39.19,79.69 D4.K 39.19,79.84 38.88,79.84 34.31,84.41 C12.+ 34.31,84.56 35.98,86.24 35.98,92.79 35.68,93.1 26.23,93.1 26.08,92.94 23.34,92.94 U2.12 | 39.19,76.79 39.19,74.35 D3.A | R4.2 28.06,76.18 32.94,76.18 33.39,76.64 IC1.4 33.55,76.79 39.19,76.79
VO1
  Top 0.152: 84.69,76.79 84.69,79.69 D2.K 84.69,79.84 84.38,79.84 79.81,84.41 C17.+ 79.81,84.56 81.48,86.24 81.48,92.79 81.18,93.1 71.73,93.1 71.58,92.94 68.84,92.94 U4.12 | 84.69,76.79 84.69,74.35 D1.A | R9.2 73.56,76.18 78.44,76.18 78.89,76.64 IC2.4 79.05,76.79 84.69,76.79
VO2
  Top 0.152: 21.71,39.19 18.81,39.19 D6.K 18.66,39.19 18.66,38.88 14.09,34.31 C30.+ 13.94,34.31 12.26,35.98 5.71,35.98 5.4,35.68 5.4,26.23 5.55,26.08 5.55,23.34 U6.12 | 21.71,39.19 24.15,39.19 D5.A | R14.2 22.32,28.06 22.32,32.94 21.86,33.39 IC3.4 21.71,33.55 21.71,39.19